# Altium PCB TMC6200_BOB.PcbDoc
Units mm, origin at the board's own origin, x right, y up, seen from the top; angles counter-clockwise.
Board outline 81 x 47 mm, 4 copper layers (Top Layer, Int1 (GND), Int2 (PWR), Bottom Layer), stack 1.334 mm thick; 76 components, 53 nets, 204 pads, 250 vias.
Unrouted connection lines stored in the file: 3.
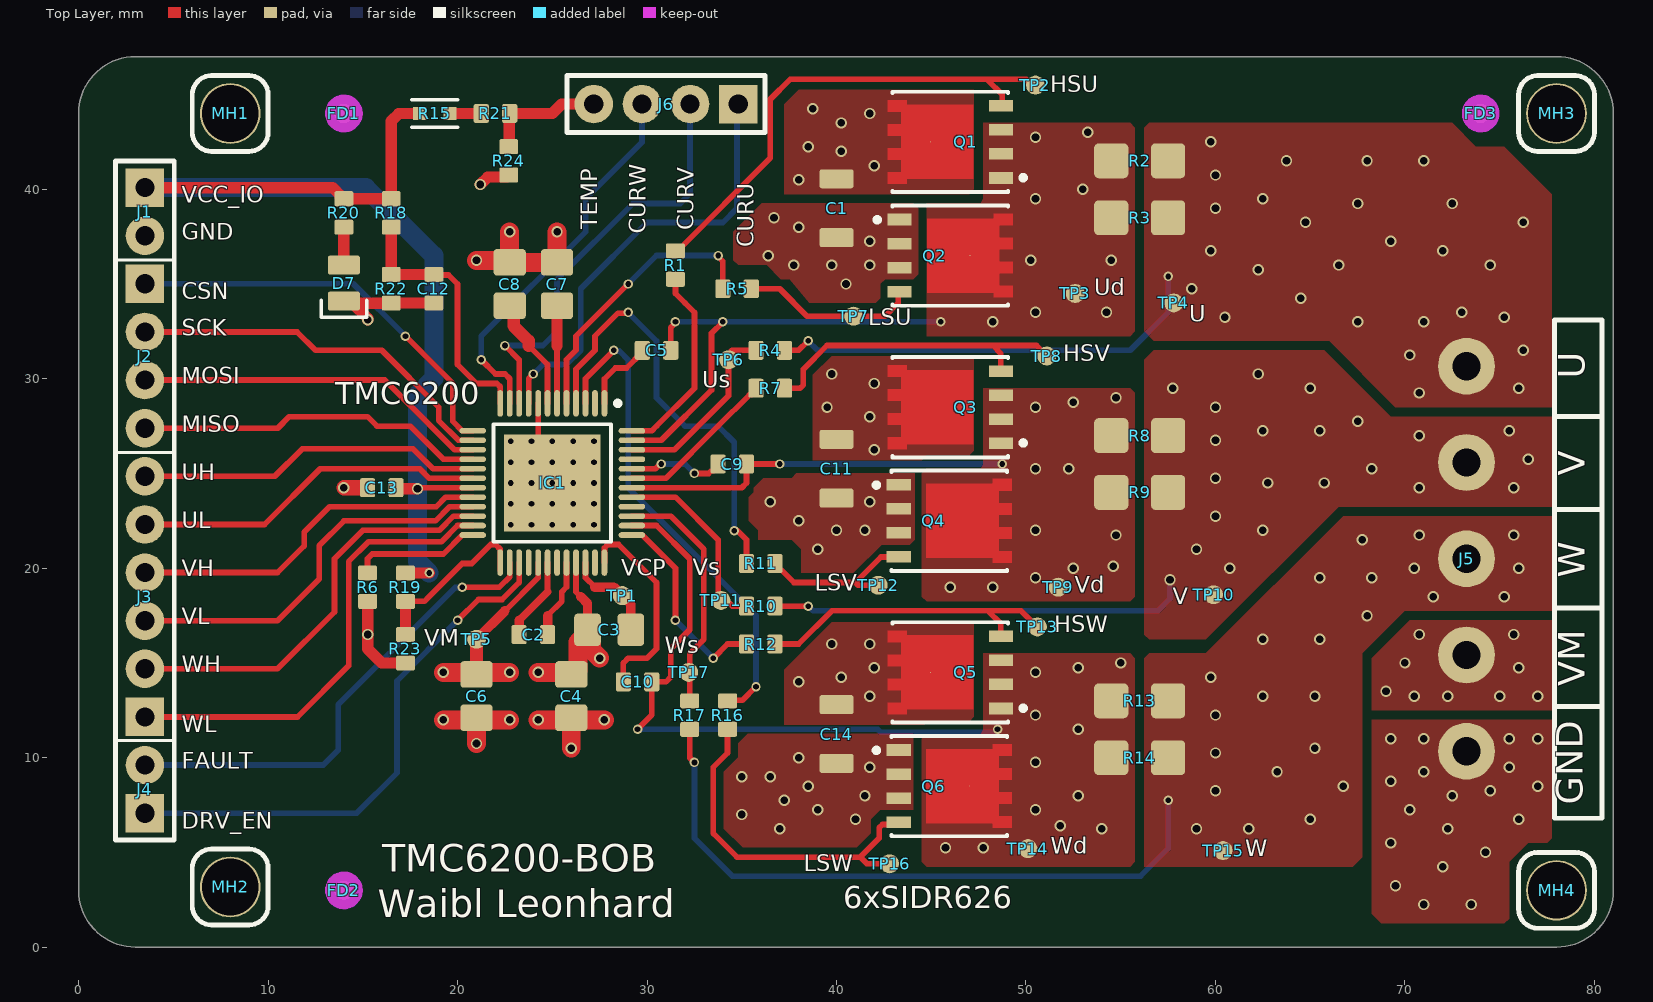
[diagram p0: Top Layer view]
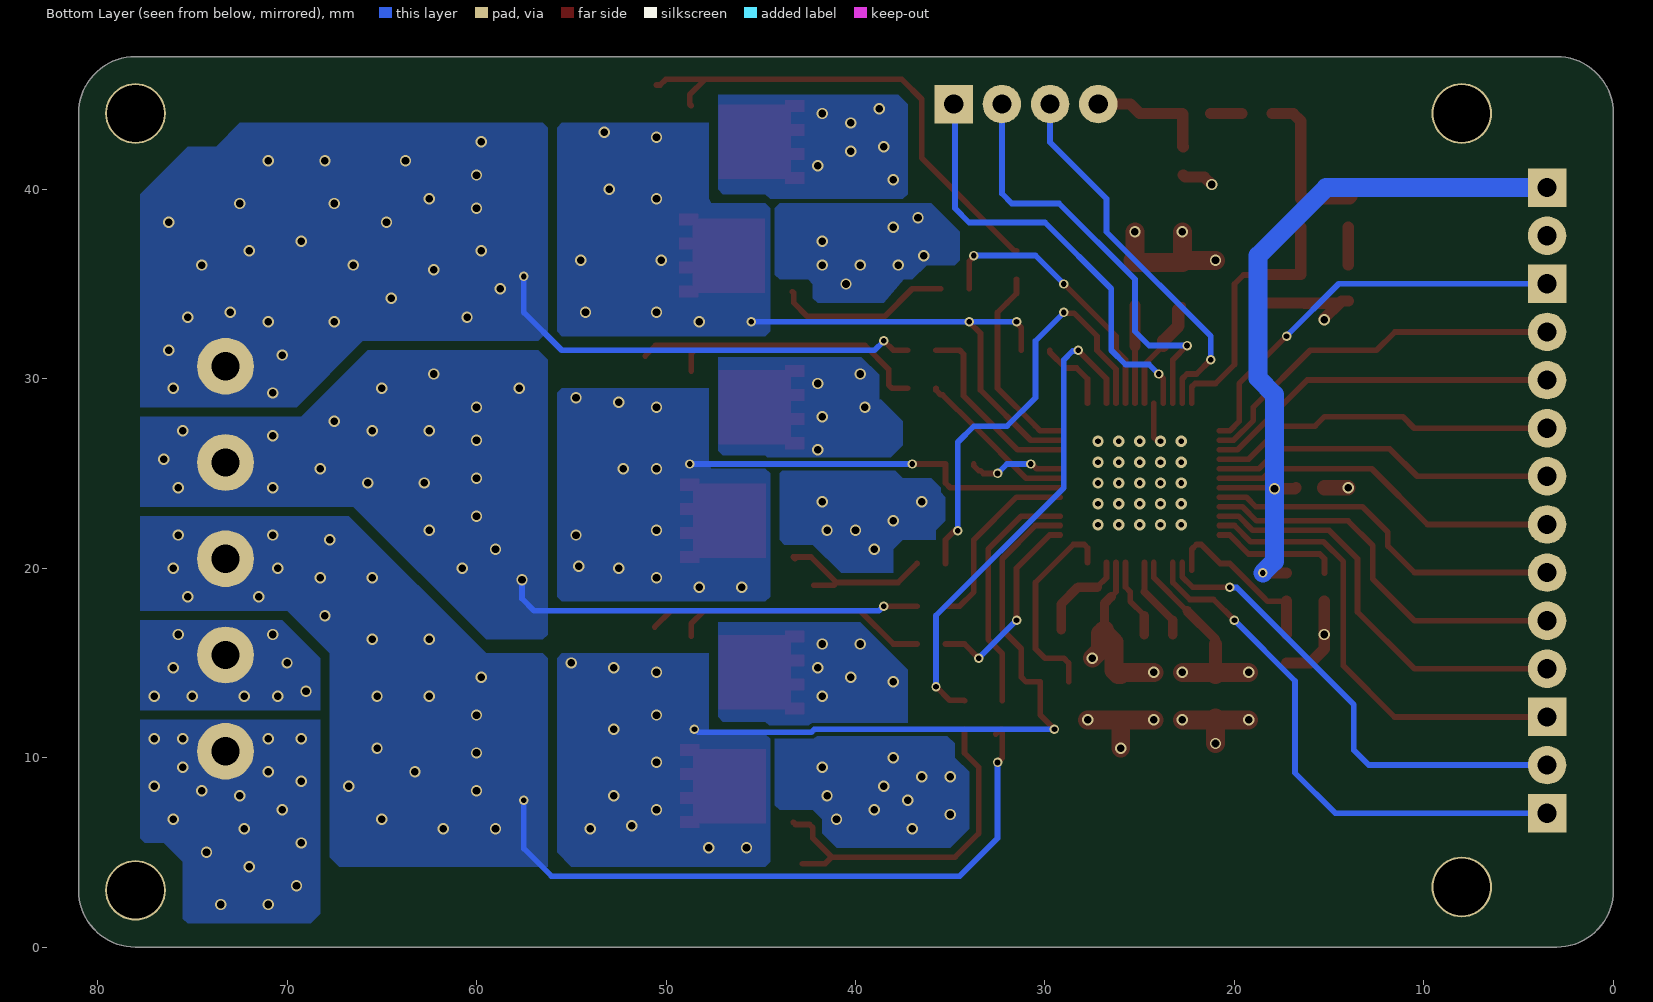
[diagram p1: Bottom Layer view, seen from below]
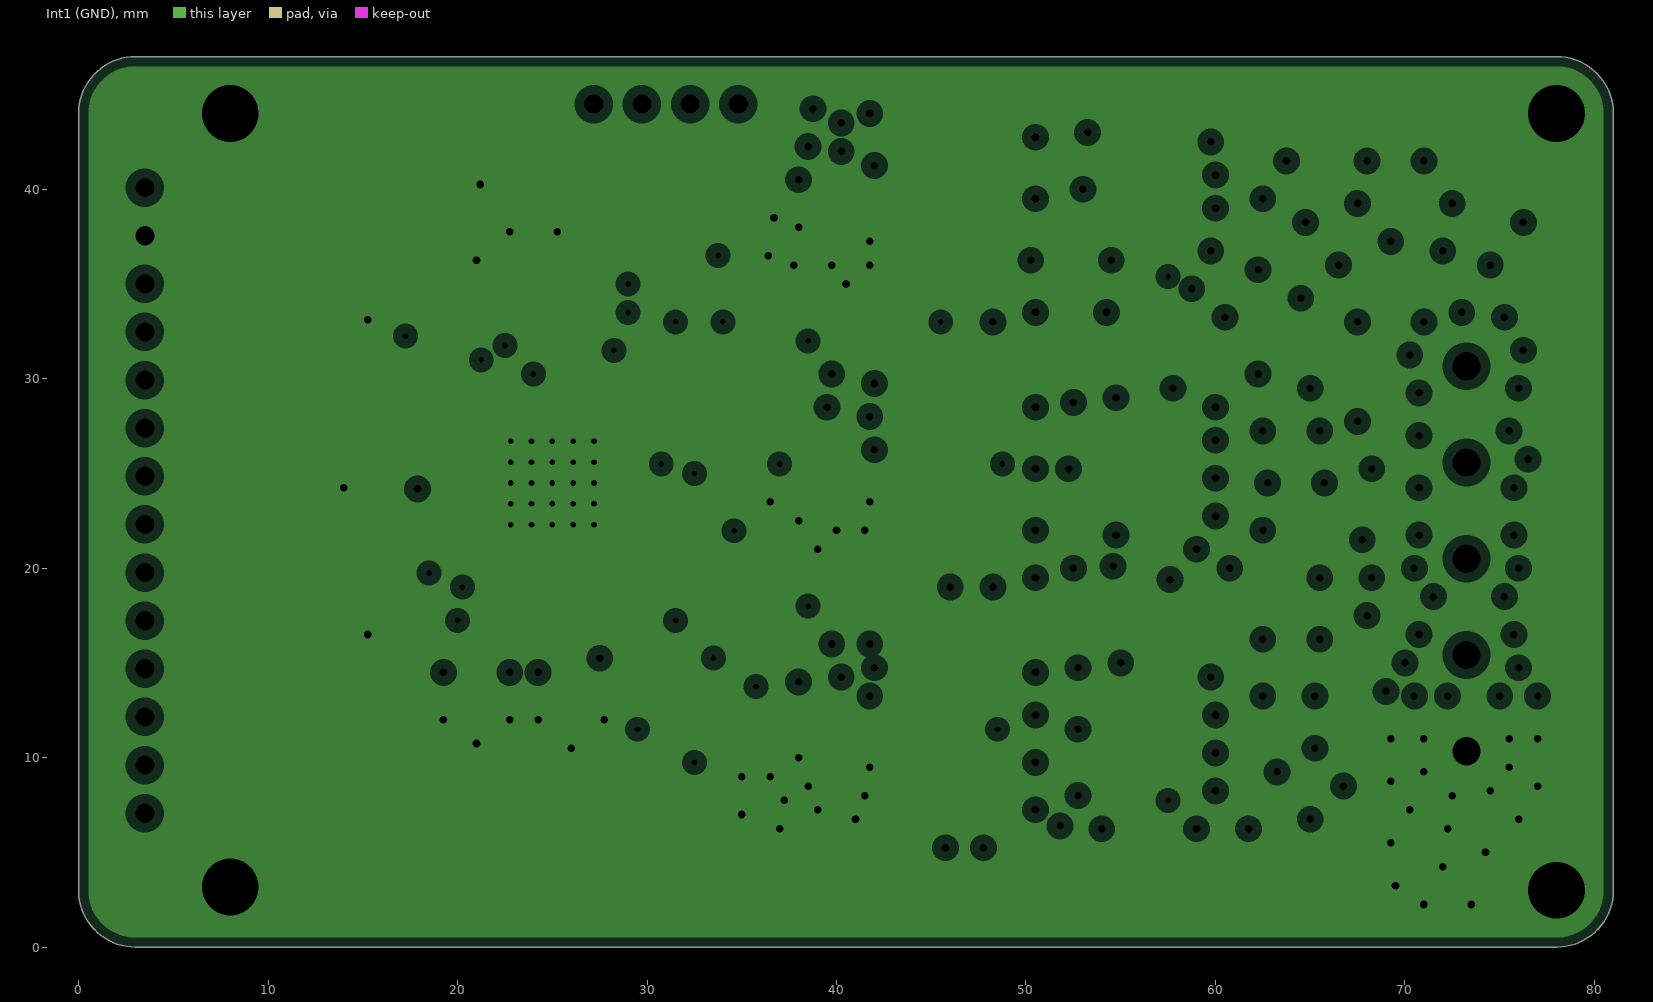
[diagram p2: Int1 (GND), clearances drawn from the general rule]
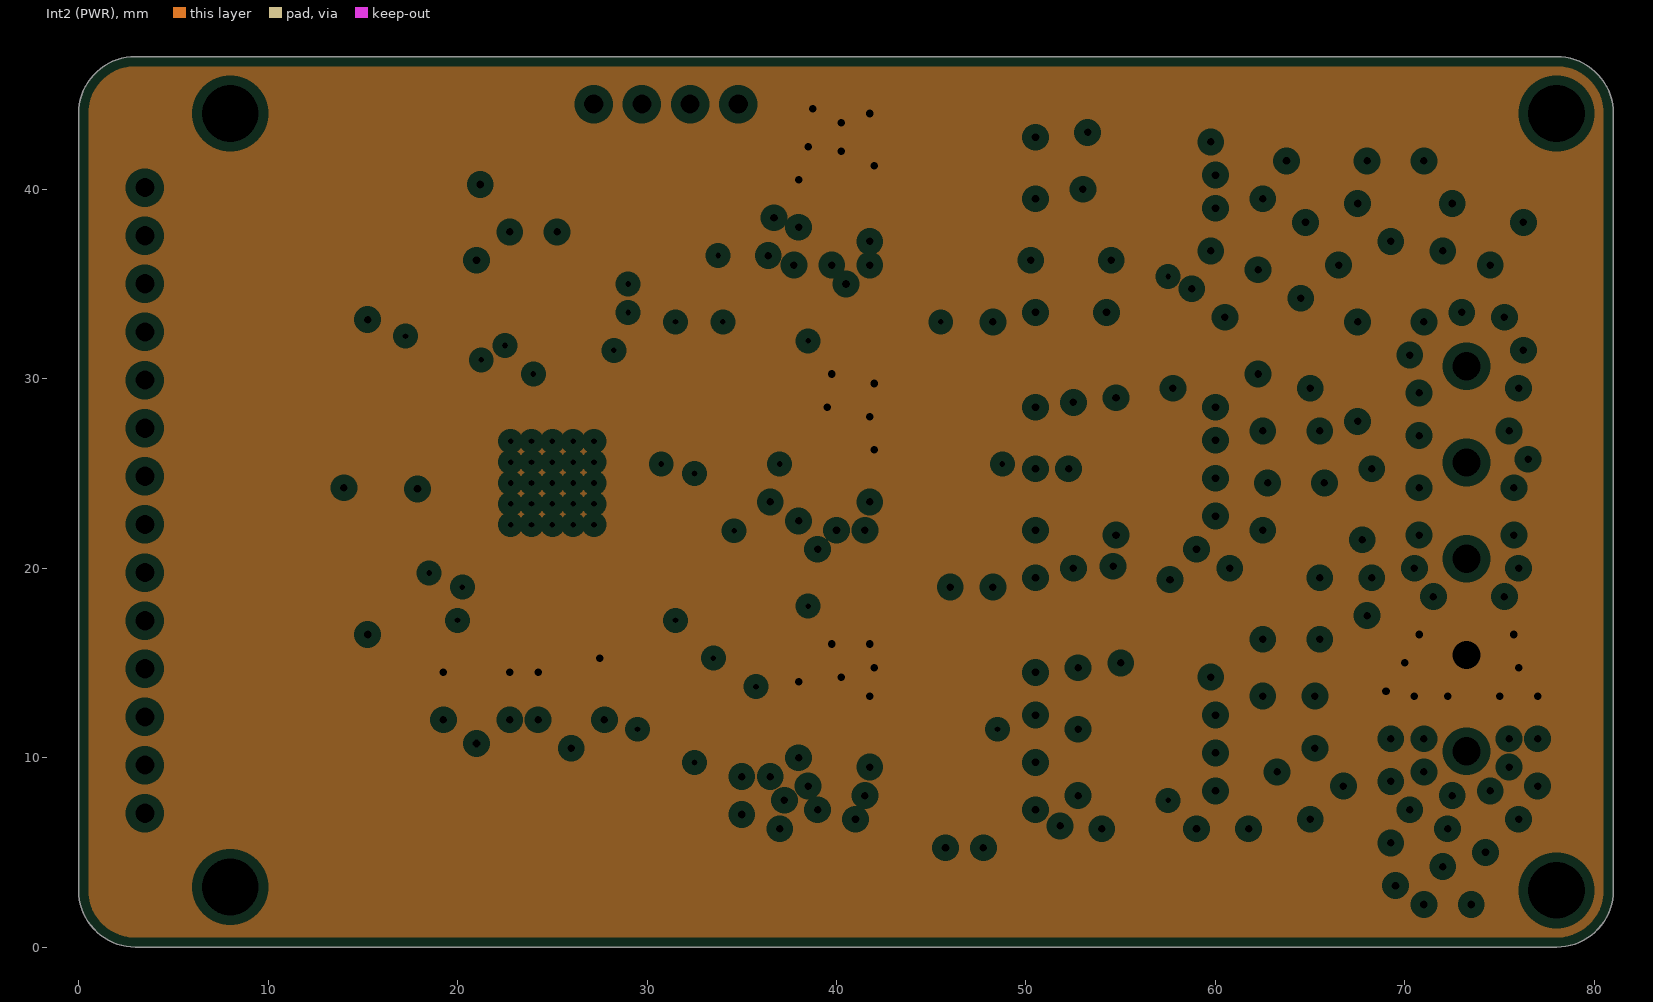
[diagram p3: Int2 (PWR), clearances drawn from the general rule]
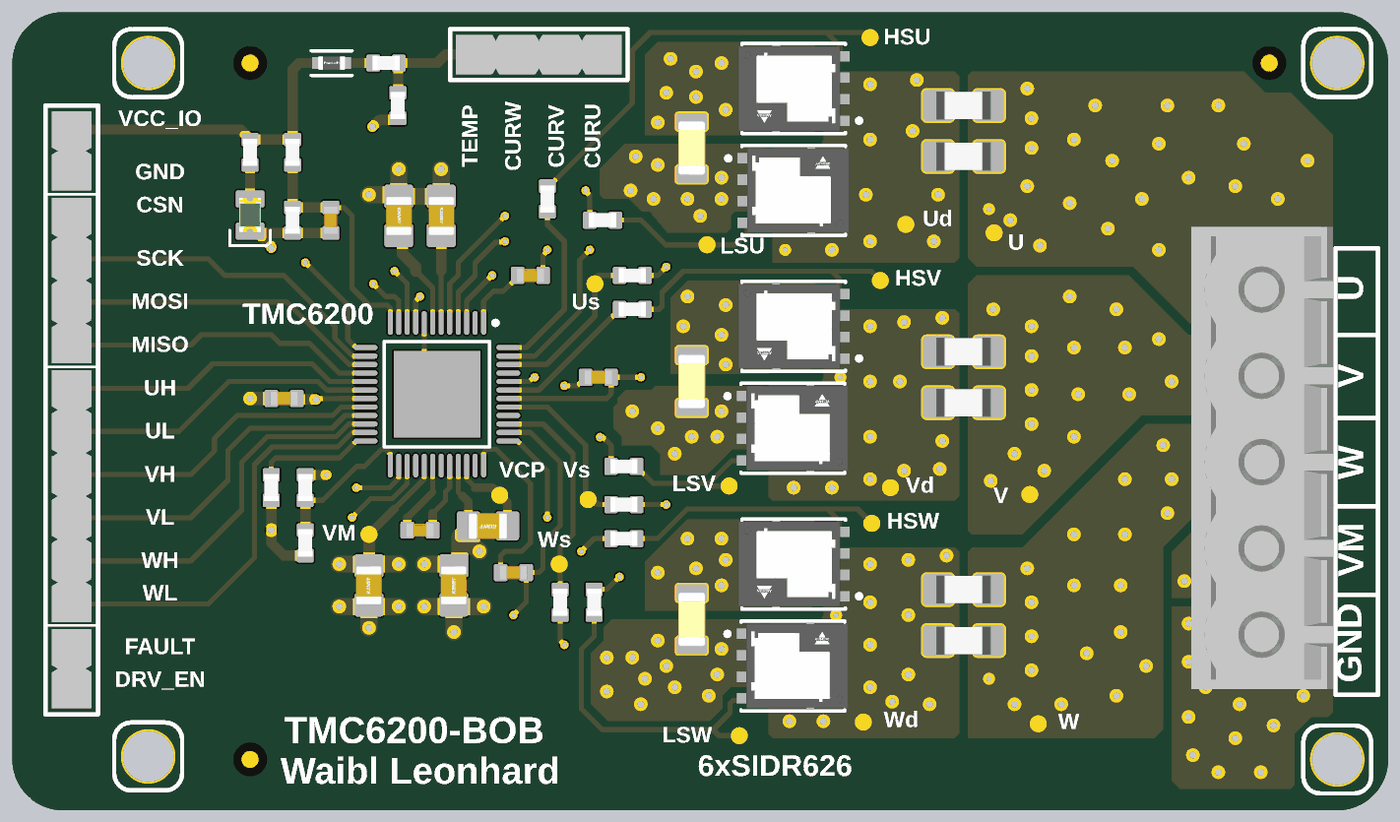
[diagram p4: 3D render of the assembled board from above, using the file's embedded part models]

## Layer stack, top to bottom
Top Solder: solder mask 0.0254, SM-002, Dk 4
Top Layer: signal copper 0.035
Dielectric 1: prepreg 0.1295, PP-017, Dk 4.3
Dielectric 2: prepreg 0.1295, PP-017, Dk 4.3
Int1 (GND): plane copper 0.0175, net GND
Dielectric 3: core 0.7112, Core-039, Dk 4.8
Int2 (PWR): plane copper 0.0175, net VM
Dielectric 4: prepreg 0.1295, PP-017, Dk 4.3
Dielectric 5: prepreg 0.1295, PP-017, Dk 4.3
Bottom Layer: signal copper 0.035
Bottom Solder: solder mask 0.0254, SM-002, Dk 4

## Board outline
3,0 cw(c3,3) 0,3 0,44 cw(c3,44) 3,47 78,47 cw(c78,44) 81,44 81,3 cw(c78,3) 78,0

## Design rules (kind name [scope] priority, off if disabled: settings)
Clearance Clearance_JLC [All] p1: gap=0.2 ignorepadtopadclearanceinfootprint=FALSE // Clearance for JLCPCB
Clearance [All] p2: gap=0.254 ignorepadtopadclearanceinfootprint=FALSE
HoleSize [All] p1: absolutevalues=TRUE maxlimit=6.3 minlimit=0.15 maxpercent=80.000 minpercent=20.000
HoleToHoleClearance [All] p1: gap=0.5 allowstackedmicrovias=TRUE
MinimumSolderMaskSliver [All] p1: minsoldermaskwidth=0.1
PlaneClearance [All] p1: clearance=0.508
PlaneConnect [All] p1: planeconnectstyle=Direct reliefexpansion=0.508 reliefentries=4 reliefconductorwidth=0.254 reliefairgap=0.254
PolygonConnect [All] p1: connectstyle=Direct reliefconductorwidth=0.254 reliefentries=4 polygonreliefangle="90 Angle" airgapwidth=0.254
RoutingVias [All] p1: holewidth=1 width=1.3 viastyle="Through Hole" minholewidth=0.3 minwidth=0.45 maxholewidth=1.85 maxwidth=10
SolderMaskExpansion [All] p1: expansion=0.102 istentingtop=FALSE
SupplyNets "Schematic Supply Nets_2" [InNet('GND')] p1: voltage=0.000
SupplyNets "Schematic Supply Nets_1" [InNet('VCC_IO')] p2: voltage=0.000
SupplyNets "Schematic Supply Nets" [InNet('VM')] p3: voltage=0.000
Width [All] p1: maxlimit=1 minlimit=0.09 preferedwidth=0.3
25 further rules are at their usual default settings.

## Components (designator, comment, footprint, x,y, rotation, side; value= is the part's Value field where it differs from the comment)
C1 "2u2/100V" CAP_1206 40,39 r90 top
C2 "22n/100V" CAP_0603 24,16.5 r0 top
C3 "100n/100V" CAP_0805#1 28,16.75 r180 top
C4 "100n/100V" CAP_0805#1 26,13.25 r90 top
C5 "470n/16V" CAP_0603 30.5,31.5 r0 top
C6 "100n/100V" CAP_0805#2 21,13.25 r90 top
C7 "2u2/50V" CAP_0805#1 25.25,35 r270 top
C8 "2u2/50V" CAP_0805#1 22.75,35 r270 top
C9 "470n/16V" CAP_0603 34.5,25.5 r0 top
C10 "470n/16V" CAP_0603 29.5,14 r0 top
C11 "2u2/100V" CAP_1206 40,25.25 r90 top
C12 "100n/50V" CAP_0603 18.75,34.75 r90 top
C13 "100n/50V" CAP_0603 16,24.25 r180 top
C14 "2u2/100V" CAP_1206 40,11.25 r90 top
D7 "LED_0805_GREEN" LED_0805_GREEN 14,35.05 r90 top
FD1 "FID1X2R" FID1X2R 14,44 r0 top
FD2 "FID1X2R" FID1X2R 14,3 r90 top
FD3 "FID1X2R" FID1X2R 74,44 r90 top
IC1 "TMC6200-TA-T" TSQFP50P900X900X120_HS-49N 25,24.5 r270 top
J1 "1x2 Header" "1x2 Header-Footprint-1" 3.5,38.82 r270 top
J2 "1x4 Header" "1x4 Header-Footprint-1" 3.5,31.2 r270 top
J3 "1x6 Header" "1x6 Header-Footprint-1" 3.5,18.5 r90 top
J4 "1x2 Header" "1x2 Header-Footprint-1" 3.5,8.34 r90 top
J5 "796636-5" 796636-5-Footprint-1 73.25,20.5 r270 top
J6 "1x4 Header" "1x4 Header-Footprint-1" 31,44.5 r180 top
MH1 "MTHP3P2MM" MTHP3P2MM-Footprint-1 8,44 r0 top
MH2 "MTHP3P2MM" MTHP3P2MM-Footprint-1 8,3.175 r0 top
MH3 "MTHP3P2MM" MTHP3P2MM-Footprint-1 78,44 r0 top
MH4 "MTHP3P2MM" MTHP3P2MM-Footprint-1 78,3 r0 top
Q1 "SIDR626LDP-T1-RE3" FP-T21-0014-SINGLE-MFG 46,42.5 r180 top
Q2 "SIDR626LDP-T1-RE3" FP-T21-0014-SINGLE-MFG 46,36.5 r0 top
Q3 "SIDR626LDP-T1-RE3" FP-T21-0014-SINGLE-MFG 46,28.5 r180 top
Q4 "SIDR626LDP-T1-RE3" FP-T21-0014-SINGLE-MFG 45.955,22.5 r0 top
Q5 "SIDR626LDP-T1-RE3" FP-T21-0014-SINGLE-MFG 46,14.5 r180 top
Q6 "SIDR626LDP-T1-RE3" FP-T21-0014-SINGLE-MFG 45.955,8.5 r0 top
R1 "2R2/1%" RES_0603 31.5,36 r90 top
R2 "0R033/1%/1W" RES_1206 56,41.5 r0 top
R3 "0R033/1%/1W" RES_1206 56,38.5 r0 top
R4 "10R/1%" RES_0603 36.5,31.5 r0 top
R5 "2R2/1%" RES_0603 34.75,34.75 r0 top
R6 "0R" RES_0603 15.25,19 r90 top
R7 "2R2/1%" RES_0603 36.5,29.5 r0 top
R8 "0R033/1%/1W" RES_1206 56,27 r0 top
R9 "0R033/1%/1W" RES_1206 56,24 r0 top
R10 "10R/1%" RES_0603 36,18 r0 top
R11 "2R2/1%" RES_0603 36,20.25 r0 top
R12 "2R2/1%" RES_0603 36,16 r0 top
R13 "0R033/1%/1W" RES_1206 56,13 r0 top
R14 "0R033/1%/1W" RES_1206 56,10 r0 top
R15 "ERT-J1VG103FA" FP-ERTJ1-MFG 18.8,44 r0 top
R16 "2R2/1%" RES_0603 34.25,12.25 r270 top
R17 "10R/1%" RES_0603 32.25,12.25 r270 top
R18 "1k5/1%" RES_0603 16.5,38.75 r90 top
R19 "0R" RES_0603 17.25,19 r90 top
R20 "1k" RES_0603 14,38.75 r90 top
R21 "1k5/1%" RES_0603 22,44 r180 top
R22 "4k7/1%" RES_0603 16.5,34.75 r90 top
R23 "0R" RES_0603 17.25,15.75 r90 top
R24 "1k5/1%" RES_0603 22.7,41.5 r90 top
TP1 "TEST_POINT_RND_1MM" PAD_RND_1MM 28.697,18.554 r90 top
TP2 "TEST_POINT_RND_1MM" PAD_RND_1MM 50.5,45.5 r90 top
TP3 "TEST_POINT_RND_1MM" PAD_RND_1MM 52.6,34.5 r90 top
TP4 "TEST_POINT_RND_1MM" PAD_RND_1MM 57.8,34 r90 top
TP5 "TEST_POINT_RND_1MM" PAD_RND_1MM 21,16.25 r90 top
TP6 "TEST_POINT_RND_1MM" PAD_RND_1MM 34.3,31 r90 top
TP7 "TEST_POINT_RND_1MM" PAD_RND_1MM 40.9,33.3 r90 top
TP8 "TEST_POINT_RND_1MM" PAD_RND_1MM 51.1,31.2 r90 top
TP9 "TEST_POINT_RND_1MM" PAD_RND_1MM 51.7,19 r90 top
TP10 "TEST_POINT_RND_1MM" PAD_RND_1MM 59.9,18.6 r90 top
TP11 "TEST_POINT_RND_1MM" PAD_RND_1MM 33.9,18.3 r90 top
TP12 "TEST_POINT_RND_1MM" PAD_RND_1MM 42.2,19.1 r90 top
TP13 "TEST_POINT_RND_1MM" PAD_RND_1MM 50.6,16.9 r90 top
TP14 "TEST_POINT_RND_1MM" PAD_RND_1MM 50.1,5.2 r90 top
TP15 "TEST_POINT_RND_1MM" PAD_RND_1MM 60.4,5.1 r90 top
TP16 "TEST_POINT_RND_1MM" PAD_RND_1MM 42.8,4.4 r90 top
TP17 "TEST_POINT_RND_1MM" PAD_RND_1MM 32.2,14.5 r90 top

## Footprints (in the part's own frame and the unit in brackets; to place one, negate y for a bottom-side part, rotate by r counter-clockwise, add the part's x,y. Pads: shape width x height; smd on the part's side, far side on the other; paste and mask are expansions set on the pad)
"1x2 Header-Footprint-1" [mil]
  rect 80x80 hole 40 paste-99999 mask+0: 1(-50,0)
  round 80 hole 40 paste-99999 mask+0: 2(50,0)
  body extent -92,-46 92,46, height 320
"1x4 Header-Footprint-1" [mil]
  rect 80x80 hole 40 paste-99999 mask+0: 1(-150,0)
  round 80 hole 40 paste-99999 mask+0: 2(-50,0) 3(50,0) 4(150,0)
  body extent -192,-46 192,46, height 320
"1x6 Header-Footprint-1" [mil]
  rect 80x80 hole 40 paste-99999 mask+0: 1(-250,0)
  round 80 hole 40 paste-99999 mask+0: 2(-150,0) 3(-50,0) 4(50,0) 5(150,0) 6(250,0)
  body extent -292,-46 292,46, height 320
796636-5-Footprint-1 [mm]
  round 3 hole 1.5 paste-2539.97 mask+0: 1(-10.16,0) 2(-5.08,0) 3(0,0) 4(5.08,0) 5(10.16,0)
  body extent -13.86,-3.85 13.36,4.5, height 12
CAP_0603 [mm]
  rrect25% 0.8x1 smd: 1(-0.75,0) 2(0.75,0)
  body extent -0.8,-0.4 0.8,0.4, height 0.51
CAP_0805#1 [mm]
  rrect25% 1.4x1.7 smd: 1(-1.143,0) 2(1.143,0)
  body extent -1.15,-0.76 1.15,0.79, height 1.01
CAP_0805#2 [mm]
  rrect25% 1.4x1.7 smd: 1(-1.143,0)
  rrect25% 1.4x1.7 smd mask+0.102: 2(1.143,0)
  body extent -1.15,-0.76 1.15,0.79, height 1.01
CAP_1206 [mm]
  rrect25% 1x1.8 smd: 1(-1.55,0) 2(1.55,0)
  body extent -1.6,-0.8 1.6,0.8, height 0.94
FID1X2R [mm] "Fiducial - Round 1x2mm"
  round 1 smd paste-0.5 mask+0.5: 0(0,0)
  Top Layer keep-out circle w1: c0,0 r0.5
FP-ERTJ1-MFG [mm]
  rect 0.7x0.7 smd paste+0 mask+0: 1(-0.8,0) 2(0.8,0)
  silkscreen extent -1.2,-0.72 1.2,0.72, body extent -1.25,-0.55 1.25,0.55, height 0.25
FP-T21-0014-SINGLE-MFG [mm]
  rect 1.27x0.61 smd paste+0 mask+0: 1(-2.67,1.905) 2(-2.67,0.635) 3(-2.67,-0.635) 4(-2.67,-1.905)
  round 0.025 smd paste+0 mask+0: 5-6-7-8(1.045,0)
  Top Layer region: 3.305,2.21 3.305,1.6 2.595,1.6 2.595,0.94 3.305,0.94 3.305,0.33 2.595,0.33 2.595,-0.33 3.305,-0.33 3.305,-0.94 2.595,-0.94 2.595,-1.6 3.305,-1.6 3.305,-2.21 2.285,-2.21 2.285,-1.955 -1.215,-1.955 -1.215,1.955 2.285,1.955 2.285,2.21 3.305,2.21
  silkscreen extent -3.98,-2.65 3.05,2.65, body extent -3.4,-2.65 3.41,2.65, height 0.25
LED_0805_GREEN [mm]
  rrect25% 1x1.7 smd: A(0.95,0) K(-0.95,0)
  silkscreen extent -1.8,-1.2 -0.9,1.2, body extent -1,-0.63 1,0.63, height 1.12
MTHP3P2MM-Footprint-1 [mm]
  round 3.2 hole 3 paste-2539.97 mask+0: 1(0,0)
  silkscreen extent -2,-2 2,2
PAD_RND_1MM [mm]
  round 1 smd paste-0.5 mask+0: 1(0,0)
RES_0603 [mm]
  rrect25% 0.8x1 smd: 1(-0.75,0) 2(0.75,0)
  body extent -0.8,-0.43 0.8,0.43, height 0.52
RES_1206 [mm]
  rrect25% 1.8x1.84 smd: 1(-1.5,0) 2(1.5,0)
  body extent -1.6,-0.83 1.6,0.83, height 0.57
TSQFP50P900X900X120_HS-49N [mm] "TSQFP, 48-Leads, Body 7,00x7,00mm, Pitch 0,50mm, Thermal Pad 5,10x5,10mm, IPC Medium Density"
  oval 1.4x0.3 smd: 1(-4.2,2.75) 2(-4.2,2.25) 3(-4.2,1.75) 4(-4.2,1.25) 5(-4.2,0.75) 6(-4.2,0.25) 7(-4.2,-0.25) 8(-4.2,-0.75) 9(-4.2,-1.25) 10(-4.2,-1.75) 11(-4.2,-2.25) 12(-4.2,-2.75) 25(4.2,-2.75) 26(4.2,-2.25) 27(4.2,-1.75) 28(4.2,-1.25) 29(4.2,-0.75) 30(4.2,-0.25) 31(4.2,0.25) 32(4.2,0.75) 33(4.2,1.25) 34(4.2,1.75) 35(4.2,2.25) 36(4.2,2.75)
  oval 0.3x1.4 smd: 13(-2.75,-4.2) 14(-2.25,-4.2) 15(-1.75,-4.2) 16(-1.25,-4.2) 17(-0.75,-4.2) 18(-0.25,-4.2) 19(0.25,-4.2) 20(0.75,-4.2) 21(1.25,-4.2) 22(1.75,-4.2) 23(2.25,-4.2) 24(2.75,-4.2) 37(2.75,4.2) 38(2.25,4.2) 39(1.75,4.2) 40(1.25,4.2) 41(0.75,4.2) 42(0.25,4.2) 43(-0.25,4.2) 44(-0.75,4.2) 45(-1.25,4.2) 46(-1.75,4.2) 47(-2.25,4.2) 48(-2.75,4.2)
  rect 5.1x5.1 smd: 49(0,0)
  silkscreen extent -4.32,-3.1 3.1,3.57, body extent -3.44,-3.5 3.56,3.5, height 1.2

## Part data
C1 C11 C14: library part CMP-001-00089-1, "Capacitor SMD 1206", Design Item ID=CAP_1206, Source=Schematic-Lib-PhilsLab.SchLib
C2 C5 C9 C10 C12 C13: library part CMP-001-00087-1, "Capacitor SMD 0603", Design Item ID=CAP_0603, Source=Schematic-Lib-PhilsLab.SchLib
C3 C4 C6 C7 C8: library part CMP-001-00088-1, "Capacitor SMD 0805", Design Item ID=CAP_0805, Source=Schematic-Lib-PhilsLab.SchLib
D7: library part CMP-004-00052-1, "LED 0805 GREEN SMD", Design Item ID=LED_0805_GREEN, Source=Schematic-Lib-PhilsLab.SchLib
FD1 FD2 FD3: library part CMP-00028-00005-2, "Fiducial - Round 1x2mm", Pins=0
IC1: library part CMP-00024-00013-6, "Surface Mount Tape & Reel (TR) Active Gate Drivers ICs CMOS 6 85V V 48-TQFP Exposed Pad Half-Bridge"
J1 J4: library part CMP-002-00330-3, "TE 5-146280-2, PCB Mount Header, Vertical, Board-to-Board, 2 Position, 2.54 mm [.1 in] Centerline, Breakaway, Gold, Through Hole - Solder, Signal, AMPMODU Headers"
J2 J6: library part CMP-002-00328-4, "TE 5-146280-3, PCB Mount Header, Vertical, Board-to-Board, 3 Position, 2.54 mm [.1 in] Centerline, Breakaway, Gold, Through Hole - Solder, Signal, AMPMODU Headers"
J3: library part CMP-002-00329-3, "TE 5-146280-6, PCB Mount Header, Vertical, Board-to-Board, 6 Position, 2.54 mm [.1 in] Centerline, Breakaway, Gold, Through Hole - Solder, Signal, Black, Carton"
J5: library part CMP-002-00327-2, "PCB Terminal Blocks, Header, Wire-to-Board, 5 Position, .2 in [5.08 mm] Centerline, 1 Row, 30 – 12 AWG Wire Size, .05 – 3 mm² Wire Size", Max Current Rating=15A, Voltage Rating=300V, Mounting Technology=Board, RoHS Compliant=Yes
MH1 MH2 MH3 MH4: library part CMP-00028-00009-2, "Mounting Hole Plated 3.2 mm drill"
Q1 Q2 Q3 Q4 Q5 Q6: library part CMP-013-00035-3, "Mosfet, N-Ch, 60V, 204A, Powerpak So Rohs Compliant: Yes", Case/Package=Powerpak, Mounting Technology=SMT, Pins=8, Transistor Type=mosfet
R1 R4 R5 R6 R7 R10 R11 R12 R16 R17 R18 R19 R20 R21 R22 R23 R24: library part CMP-009-00179-2, "Resistor SMD 0603", Design Item ID=RES_0603, Source=Schematic-Lib-PhilsLab.SchLib
R2 R3 R8 R9 R13 R14: library part CMP-009-00181-2, "Resistor SMD 1206", Design Item ID=RES_1206, Source=Schematic-Lib-PhilsLab.SchLib
R15: library part CMP-05419-000001-1, "THERMISTOR NTC 10KOHM 3380K 0603", Case Code (Imperial)=0603, Case Code (Metric)=1608, Max Operating Temperature=125°C, Max Power Dissipation=100mW, Min Operating Temperature=-40°C, Package Quantity=4000, Resistance=10kR, Resistance Tolerance=1%, Accuracy=1%, Case/Package=0603, Depth=0.8mm, Height=0.8mm, Lead Free="Lead Free", Length=1.6mm, Mount="Surface Mount", Number of Pins=2, Packaging="Tape and Reel", Power Rating=100mW, Radiation Hardening=No, REACH SVHC="No SVHC", RoHS Compliant=Yes, Series=ERT-J, Termination=SMD/SMT, Tolerance=1%, Width=800um
TP1 TP2 TP3 TP4 TP5 TP6 TP7 TP8 TP9 TP10 TP11 TP12 TP13 TP14 TP15 TP16 TP17: library part CMP-023-000001-1, "Test Point Round 1mm (NO BOM)", Design Item ID=TEST_POINT_RND_1MM, Source=Schematic-Lib-PhilsLab.SchLib

## Via types
v1: diameter 0.6, hole 0.4, Top Layer to Bottom Layer, 196 vias
v2: diameter 0.5, hole 0.3, Top Layer to Bottom Layer, 29 vias
v3: diameter 0.6, hole 0.3, Top Layer to Bottom Layer, 25 vias

## Nets (pads, with @x,y where several pads share a name; then routed paths per layer and width w, separated by ;. In a path a pad name is that pad's centre, name@x,y a point inside that pad or via, vN(x,y) a via of type N, cw(c..) or ccw(c..) an arc to the next point about the centre after c; other vN are vias at no path point)
CSN: IC1.13 J2.1 | length 21.7
  Top Layer w0.3: v2(17.25,32.25) 19.75,29.75 19.75,27.75 20.25,27.25 IC1.13
  Bottom Layer w0.3: J2.1 14.49,35.01 v2(17.25,32.25)
CURU: IC1.9 J6.1 | length 23.5
  Top Layer w0.3: IC1.9 23.75,30 v2(24,30.25)
  Bottom Layer w0.3: v2(24,30.25) 24.5,30.75 25.75,30.75 26.5,31.5 26.5,34.75 30,38.25 34,38.25 34.75,39 34.75,44.44 J6.1
CURV: IC1.10 J6.2 | length 22.8
  Top Layer w0.3: v2(22.5,31.75) 23.25,31 IC1.10
  Bottom Layer w0.3: v2(22.5,31.75) 24.5,31.75 25.25,32.5 25.25,35.25 29.25,39.25 31.75,39.25 32.27,39.77 J6.2
CURW: IC1.11 J6.3 | length 20.2
  Top Layer w0.3: v2(21.25,31) 22,30.25 22.5,30.25 22.75,30 IC1.11
  Bottom Layer w0.3: v2(21.25,31) 21.25,32.25 26.75,37.75 26.75,39.5 29.73,42.48 J6.3
DRV_EN: IC1.27 J4.1 | length 28.7
  Top Layer w0.3: v2(20,17.25) 21.1,18.35 22.35,18.35 23.25,19.25 IC1.27
  Bottom Layer w0.3: J4.1 14.67,7.07 16.8,9.2 16.8,14.05 v2(20,17.25)
FAULT: IC1.26 J4.2 | length 25.5
  Top Layer w0.3: v2(20.25,19) 22.207,19 22.75,19.543 IC1.26
  Bottom Layer w0.3: J4.2 12.91,9.61 13.7,10.4 13.7,12.8 19.88,18.98 20.23,18.98 v2(20.25,19)
GND: C1.1 C4.1 C6.1 C7.1 C8.1 C11.1 C12.1 C13.2 C14.1 D7.K IC1.8 IC1.49 J1.2 J5.5 MH1.1 MH2.1 MH3.1 MH4.1 Q2.1 Q2.2 Q2.3 Q4.1 Q4.2 Q4.3 Q6.1 Q6.2 Q6.3 R6.1 R22.1 R23.1 R24.1 | length 33.6
  Top Layer w0.3: v3(23.9,26.7) 24.05,26.7 24.25,26.9 IC1.8
  Top Layer w0.6: D7.K 14.35,34.1 D7.K@14.466,33.984 ; R6.1 v1(15.25,16.5) 15.25,15.75 16,15 R23.1 ; v1(15.25,33.12) 15.25,33.2 D7.K@14.466,33.984 ; C12.1 R22.1 16.316,34 16.3,33.984 D7.K@14.466,33.984 ; v1(21.2,40.25) 21.6,40.65 22.6,40.65 R24.1
  Top Layer w0.8: v1(14,24.25) C13.2
  Top Layer w1: v1(19.25,12) 20.893,12 C6.1 ; v1(21,10.75) C6.1 ; v1(21,36.25) 22.643,36.25 C8.1 ; v1(22.75,12) 21.107,12 C6.1 ; v1(22.75,37.75) C8.1 ; v1(24.25,12) C4.1@26,12 ; v1(25.25,37.75) C7.1 ; C7.1@25.357,36.25 C7.1 ; v1(26,10.5) C4.1@26,12 ; v1(27.75,12) C4.1@26,12 ; C8.1 C7.1
  other v1: 71,2.25 73.5,2.25 69.5,3.25 72,4.25 74.25,5 69.25,5.5 37,6.25 72.25,6.25 41,6.75 76,6.75 35,7 39,7.25 70.25,7.25 37.25,7.75 41.5,8 72.5,8 74.5,8.25 38.5,8.5 77,8.5 69.25,8.75 35,9 36.5,9 71,9.25 41.75,9.5 75.5,9.5 38,10 69.25,11 71,11 75.5,11 77,11 39,21 40,22 41.5,22 38,22.5 36.5,23.5 41.75,23.5 40.5,35 37.75,36 39.75,36 41.75,36 36.4,36.5 41.75,37.25 38,38 36.7,38.5
  other v3: 22.8,22.3 23.9,22.3 25,22.3 26.1,22.3 27.2,22.3 22.8,23.4 23.9,23.4 25,23.4 26.1,23.4 27.2,23.4 22.8,24.5 23.9,24.5 25,24.5 26.1,24.5 27.2,24.5 22.8,25.6 23.9,25.6 25,25.6 26.1,25.6 27.2,25.6 22.8,26.7 25,26.7 26.1,26.7 27.2,26.7
HSU: IC1.48 R1.1 | length 10.4
  Top Layer w0.3: IC1.48 30.25,27.25 30.5,27.5 32.5,29.5 32.5,33.5 32,34 31.5,34.5 R1.1
HSV: IC1.43 R7.1 | length 8.6
  Top Layer w0.3: IC1.43 31,24.75 33.75,27.5 35.4,29.15 35.5,29.15 35.75,29.4 R7.1
HSW: IC1.37 R12.1 | length 10.7
  Top Layer w0.3: IC1.37 29.75,21.75 31.5,20 v2(31.5,17.25) ; v2(33.5,15.25) 34.25,16 R12.1
  Bottom Layer w0.3: v2(31.5,17.25) v2(33.5,15.25)
LSU: IC1.5 R5.1 | length 14.9
  Top Layer w0.3: IC1.5 25.75,31 26.25,31.5 26.25,32.25 v2(29,35) ; v2(33.75,36.5) 33.75,36.446 34,36.196 R5.1
  Bottom Layer w0.3: v2(29,35) 30.5,36.5 v2(33.75,36.5)
LSV: IC1.4 R11.1 | length 23.2
  Top Layer w0.3: IC1.4 26.25,30.5 27.25,31.5 27.25,32.25 28.462,33.462 28.962,33.462 v2(29,33.5) ; v2(34.6,21.976) 34.726,21.976 34.75,22 35.25,21.5 R11.1
  Bottom Layer w0.3: v2(29,33.5) 30.5,32 30.5,29 32,27.5 33.75,27.5 34.6,26.65 v2(34.6,21.976)
LSW: IC1.3 R16.1 | length 26.2
  Top Layer w0.3: IC1.3 26.75,30 v2(28.25,31.5) ; R16.1 34.274,13.024 35.024,13.024 v2(35.75,13.75)
  Bottom Layer w0.3: v2(28.25,31.5) 28.288,31.462 28.538,31.462 29,31 29,24.25 35.75,17.5 v2(35.75,13.75)
MISO: IC1.16 J2.4 | length 18.5
  Top Layer w0.3: J2.4 10.505,27.39 11.115,28 15.25,28 15.75,27.5 17.5,27.5 19.25,25.75 IC1.16
MOSI: IC1.15 J2.3 | length 18.8
  Top Layer w0.3: J2.3 16.156,29.93 19.836,26.25 19.866,26.25 IC1.15
NetC2_1: C2.1 IC1.30 | length 4.4
  Top Layer w0.3: 24.75,18.75 IC1.30
  Top Layer w0.4: 23.25,17.25 24.75,18.75
  Top Layer w0.5: C2.1 23.25,17.25
NetC2_2: C2.2 IC1.32 | length 4.2
  Top Layer w0.3: 24.75,17.5 25.5,18.25 25.5,18.75 25.75,19 IC1.32
  Top Layer w0.5: C2.2 24.75,17.5
NetC3_1: C3.1 IC1.34 TP1.1 | length 5.1
  Top Layer w0.3: IC1.34 26.75,19.5 27.25,19
  Top Layer w0.5: 27.25,19 28.25,19 29.143,18.107 C3.1
NetC5_1: C5.1 IC1.1 | length 4
  Top Layer w0.3: IC1.1 27.75,29.993 28.328,30.572 28.922,30.572 29.75,31.4 C5.1
NetC7_2: C7.2 IC1.6 | length 5.2
  Top Layer w0.3: IC1.6 25.25,31.75
  Top Layer w0.6: 25.25,31.75 C7.2
NetC8_2: C8.2 IC1.7 | length 6
  Top Layer w0.3: 23.75,31.75 24.75,30.75 IC1.7
  Top Layer w0.4: C8.2 C8.2@22.959,33.648
  Top Layer w0.67: C8.2@22.959,33.648 22.959,32.791 23.75,32 23.75,31.75
NetC9_1: C9.1 IC1.44 | length 5.1
  Top Layer w0.3: IC1.44 30.446,25.25 30.696,25.5 v2(30.75,25.5) ; v2(32.5,25) 33.25,25 33.4,25.15 33.5,25.15 33.75,25.4 C9.1
  Bottom Layer w0.3: v2(30.75,25.5) 32,25.5 v2(32.5,25)
NetC10_1: C10.1 IC1.36 | length 11
  Top Layer w0.3: IC1.36 27.75,21.074 27.926,21.25 28.5,21.25 30.5,19.25 30.5,15.75 30,15.25 29,15.25 28.75,15 C10.1
NetD7_A: D7.A R20.1 | length 2
  Top Layer w0.6: D7.A R20.1
NetIC1_24: IC1.24 R6.2 | length 6.7
  Top Layer w0.3: R6.2 15.25,20.5 15.5,20.75 ; 15.589,20.75 19.25,20.75 20.25,21.75 IC1.24
NetQ1_4: Q1.4 R1.2 TP2.1 | length 26.4
  Top Layer w0.3: R1.2 31.6,36.75 36.5,41.65 36.5,44.75 37.55,45.8 47.95,45.8 ; Q1.4 48.75,44.485 48.75,45 47.95,45.8 ; TP2.1 50.311,45.5 50.011,45.8 47.95,45.8
NetQ2_4: Q2.4 R5.2 TP7.1 | length 9.3
  Top Layer w0.3: R5.2 37,34.75 38.45,33.3 42.55,33.3 43.266,34.016 43.266,34.531 Q2.4
NetQ3_4: Q3.4 R7.2 TP8.1 | length 17
  Top Layer w0.3: R7.2 38.074,29.5 38.25,29.676 38.25,30.5 39.5,31.75 48.25,31.75 ; Q3.4 48.67,31.33 48.25,31.75 ; TP8.1 50.55,31.75 48.25,31.75
NetQ4_4: Q4.4 R11.2 TP12.1 | length 8.9
  Top Layer w0.3: R11.2 37.75,19.25 41,19.25 ; TP12.1 41.15,19.1 41,19.25 ; Q4.4@43.19,20.5 Q4.4 42.345,20.595 41,19.25
NetQ5_4: Q5.4 R12.2 TP13.1 | length 16.5
  Top Layer w0.3: R12.2 38,16 39.75,17.75 48,17.75 ; Q5.4 48.67,17.08 48,17.75 ; TP13.1 49.75,17.75 48,17.75
NetQ6_4: Q6.4 R16.2 TP16.1 | length 18.9
  Top Layer w0.3: R16.2 34.25,10.25 33.5,9.5 33.5,6 34.75,4.75 41.25,4.75 ; TP16.1 41.6,4.4 41.25,4.75 ; Q6.4 43.168,6.478 42.426,6.478 42.25,6.302 42.25,5.75 41.25,4.75
NetR15_2: R15.2 R21.2 | length 1.6
  Top Layer w0.6: R15.2 R21.2
SCK: IC1.14 J2.2 | length 20.1
  Top Layer w0.3: J2.2 11.53,32.47 12.5,31.5 16,31.5 19,28.5 19,27.793 20.043,26.75 IC1.14
SPE: IC1.25 R19.1 R23.2 | length 9
  Top Layer w0.3: R19.1 18.25,18.25 ; 18.376,18.376 20.25,20.25 20.75,20.25 21.751,21.251 21.999,21.251 22.25,21 IC1.25 IC1.25@22.25,19.901
  Top Layer w0.6: R23.2 R19.1
TEMP: J6.4 R21.1 R24.2 | length 6.6
  Top Layer w0.6: R24.2 22.725,42.275 22.725,43.975 R21.1 25,44 25.5,44.5 J6.4 J6.4@27.095,44.405
U: J5.1 R2.2 R3.2 R4.2 TP4.1 | length 23.4
  Top Layer w0.3: R4.2 38,31.5 v2(38.5,32)
  Bottom Layer w0.3: v2(38.5,32) 39,31.5 55.5,31.5 57.5,33.5 v2(57.5,35.4)
  other v1: 70.75,29.25 76,29.5 70.25,31.25 76.25,31.5 67.5,33 71,33 60.5,33.25 75.25,33.25 73,33.5 64.5,34.25 58.75,34.75 62.25,35.75 66.5,36 74.5,36 59.75,36.75 72,36.75 69.25,37.25 64.75,38.25 76.25,38.25 60,39 67.5,39.25 72.5,39.25 62.5,39.5 60,40.75 63.75,41.5 68,41.5 71,41.5 59.75,42.5
U_DRV: C5.2 IC1.47 Q1.1 Q1.2 Q1.3 Q2.5-6-7-8 R2.1 R3.1 TP3.1 | length 24.7
  Top Layer w0.3: IC1.47 30.75,26.75 33.4,29.4 33.4,32.4 v2(34,33) ; C5.2 31.25,32.696 31.5,32.946 v2(31.5,33)
  Bottom Layer w0.3: v2(31.5,33) v2(45.5,33)
  other v1: 48.25,33 50.5,33.5 54.25,33.5 50.25,36.25 54.5,36.25 50.5,39.5 53,40 50.5,42.75 53.25,43
UH: IC1.17 J3.6 | length 18.3
  Top Layer w0.3: J3.6 10.35,24.85 11.8,26.3 17.657,26.3 18.707,25.25 IC1.17
UL: IC1.18 J3.5 | length 18.7
  Top Layer w0.3: J3.5 9.81,22.31 12.75,25.25 18,25.25 18.5,24.75 IC1.18
Usense: IC1.46 R4.1 TP6.1 | length 10
  Top Layer w0.3: IC1.46 31.45,26.25 34.3,29.1 34.3,31.3 34.5,31.5 R4.1
V: J5.2 R8.2 R9.2 R10.2 TP10.1 | length 22.2
  Top Layer w0.3: R10.2 v2(38.5,18)
  Bottom Layer w0.3: v2(38.5,18) 38.523,18 38.776,17.748 56.952,17.748 57.6,18.395 v1(57.6,19.4)
  other v1: 60.75,20 59,21 62.5,22 60,22.75 70.75,24.25 75.75,24.25 62.75,24.5 65.75,24.5 60,24.75 68.25,25.25 76.5,25.75 60,26.75 70.75,27 62.5,27.25 65.5,27.25 75.5,27.25 67.5,27.75 60,28.5 57.75,29.5 65,29.5 62.25,30.25
V_DRV: C9.2 IC1.42 Q3.1 Q3.2 Q3.3 Q4.5-6-7-8 R8.1 R9.1 TP9.1 | length 20.7
  Top Layer w0.3: IC1.42 35,24.25 35.25,24.5 C9.2 v2(37,25.5)
  Bottom Layer w0.3: v2(37,25.5) v2(48.75,25.5)
  other v1: 46,19 48.25,19 50.5,19.5 52.5,20 54.6,20.1 54.75,21.75 50.5,22 50.5,25.25 52.25,25.25 50.5,28.5 52.5,28.75 54.75,29
V_OFS: C12.2 IC1.12 R18.1 R22.2 | length 14.1
  Top Layer w0.3: C12.2 18.774,35.476 19.524,35.476 20,35 20,30.75 21,29.75 22.074,29.75 22.25,29.574 IC1.12
  Top Layer w0.6: R18.1 R22.2 C12.2
VCC_IO: C13.1 IC1.19 J1.1 R15.1 R18.2 R19.2 R20.2 | length 58.5
  Top Layer w0.3: v1(17.886,24.189) 17.943,24.247 19.228,24.247 19.231,24.25 IC1.19
  Top Layer w0.6: J1.1 13.41,40.09 13.8,39.7 13.8,39.6 13.9,39.5 R18.2 16.5,43.6 16.9,44 R15.1 ; C13.1 16.811,24.189 v1(17.886,24.189) ; R19.2 v2(18.5,19.75)
  Bottom Layer w1: J1.1 15.16,40.09 18.75,36.5 18.75,30.027 17.886,29.163 v1(17.886,24.189) 17.886,20.364 v2(18.5,19.75)
VH: IC1.20 J3.4 | length 19.4
  Top Layer w0.3: J3.4 10.5,19.77 11.9,21.17 11.9,21.9 13.25,23.25 18.879,23.25 19.379,23.75 IC1.20
VL: IC1.21 J3.3 | length 20.8
  Top Layer w0.3: J3.3 10.5,17.23 12.7,19.43 12.7,21.2 14,22.5 18.836,22.5 19.586,23.25 IC1.21
VM: C1.2 C3.2 C4.2 C6.2 C11.2 C14.2 IC1.29 IC1.33 J5.4 Q1.5-6-7-8 Q3.5-6-7-8 Q5.5-6-7-8 TP5.1 | length 21
  Top Layer w0.3: 22.5,17.75 24.25,19.5 IC1.29 ; IC1.33 26.25,18.75 26.5,18.5
  Top Layer w0.5: TP5.1@21,16 TP5.1 22.5,17.75 ; 26.5,18.5 26.857,18.143 C3.2
  Top Layer w0.7: C6.2 TP5.1@21,16
  Top Layer w1: v1(19.25,14.5) 20.893,14.5 C6.2 21.107,14.5 v1(22.75,14.5) ; v1(24.25,14.5) 25.893,14.5 C4.2 26.15,14.393 26.35,14.593 26.35,16.093 26.857,16.6 C3.2 27.057,16.55 27.057,15.693 v1(27.5,15.25)
  other v1: 41.75,13.25 70.5,13.25 72.25,13.25 75,13.25 77,13.25 69,13.5 38,14 40.25,14.25 42,14.75 76,14.75 70,15 39.75,16 41.75,16 70.75,16.5 75.75,16.5 42,26.25 41.75,28 39.5,28.5 42,29.75 39.75,30.25 38,40.5 42,41.25 40.25,42 38.5,42.25 40.25,43.5 41.75,44 38.75,44.25
Vsense: IC1.41 R10.1 TP11.1 | length 10
  Top Layer w0.3: IC1.41 31.5,23.75 33.75,21.5 33.75,18.75 34.5,18 R10.1
W: J5.3 R13.2 R14.2 R17.2 TP15.1 | length 35.3
  Top Layer w0.3: v2(32.5,9.75) 32.25,10 R17.2 32.35,11.5 R17.2@32.6,11.25
  Bottom Layer w0.3: v2(32.5,9.75) 32.5,5.75 34.5,3.75 56.05,3.75 57.5,5.2 v2(57.5,7.75)
  other v1: 59,6.25 61.75,6.25 65,6.75 60,8.25 66.75,8.5 63.25,9.25 60,10.25 65.25,10.5 60,12.25 62.5,13.25 65.25,13.25 59.75,14.25 62.5,16.25 65.5,16.25 68,17.5 71.5,18.5 75.25,18.5 65.5,19.5 68.25,19.5 70.5,20 76,20 67.75,21.5 70.75,21.75 75.75,21.75
W_DRV: C10.2 IC1.38 Q5.1 Q5.2 Q5.3 Q6.5-6-7-8 R13.1 R14.1 TP14.1 | length 33.5
  Top Layer w0.3: IC1.38 30.5,22.25 32.25,20.5 32.25,16.75 31.25,15.75 31.25,14.25 31,14 C10.2 30.25,12.25 v2(29.5,11.5)
  Bottom Layer w0.3: v2(29.5,11.5) 42.169,11.5 42.319,11.35 48.296,11.35 48.446,11.5 v2(48.5,11.5)
  other v1: 45.75,5.25 47.75,5.25 54,6.25 51.8,6.4 50.5,7.25 52.75,8 50.5,9.75 52.75,11.5 50.5,12.25 50.5,14.5 52.75,14.75 55,15
WH: IC1.22 J3.2 | length 22.3
  Top Layer w0.3: J3.2 10.5,14.69 13.5,17.69 13.5,20.5 15,22 19.043,22 19.793,22.75 IC1.22
WL: IC1.23 J3.1 | length 24.7
  Top Layer w0.3: J3.1 11.55,12.15 14.25,14.85 14.25,20.35 15.3,21.4 19.15,21.4 20,22.25 IC1.23
Wsense: IC1.39 R17.1 TP17.1 | length 12.8
  Top Layer w0.3: IC1.39 31.25,22.75 33,21 33,16.25 32.25,15.5 R17.1
pads on no net: FD1.0 FD2.0 FD3.0 IC1.2 IC1.28 IC1.31 IC1.35 IC1.40 IC1.45

## Polygon pours and split planes (outlines as drawn)
V on Bottom Layer "V_L04_P016" (solid, pour order 16): 56.25,31 56.75,31.5 65.75,31.5 69.25,28 77.75,28 77.75,23.25 66.5,23.25 59.5,16.25 56.5,16.25 56.25,16.5
U on Bottom Layer "U_L04_P050" (solid, pour order 50): 56.25,43.25 56.5,43.5 72.5,43.5 73.75,42.25 75.25,42.25 77.75,39.75 77.75,28.5 69.5,28.5 66,32 56.75,32 56.25,32.5
GND on Bottom Layer "GND_L04_P047" (solid, pour order 47): 44.25,11 44,11.25 35.25,11.25 34.75,10.75 34.75,10 34,9.25 34,6.25 35,5.25 41,5.25 41.75,6 41.75,6.75 42.25,7.25 44,7.25 44.25,7.5
GND on Bottom Layer "GND_L04_P049" (solid, pour order 49): 44.25,39 44,39.25 36,39.25 34.5,37.75 34.5,36.25 34.75,36 36.25,36 37,35.25 37.458,35.25 38.5,34 42,34 42.25,34.25 42.25,35 42.5,35.25 44,35.25 44.25,35.5
GND on Bottom Layer "GND_L04_P046" (solid, pour order 46): 44,25 43.75,25.25 38,25.25 37.5,24.75 36,24.75 35.5,24.25 35.5,24 35.25,23.75 35.25,22.5 35.75,22 35.75,21.5 37.5,21.5 38,21 38,19.75 40.75,19.75 42.25,21.25 43.75,21.25 44,21.5
GND on Bottom Layer "GND_L04_P045" (solid, pour order 45): 68.25,12 77.75,12 77.75,5.75 77.5,5.5 76.5,5.5 75.5,4.5 75.5,1.5 75.25,1.25 74.75,1.25 68.75,1.25 68.25,1.75
VM on Bottom Layer "VM_L04_P009" (solid, pour order 9): 47.25,17.15 39.75,17.15 37.25,14.65 37.25,11.65 44.5,11.65 44.75,11.9 47,11.9 47.25,12.15
VM on Bottom Layer "VM_L04_P010" (solid, pour order 10): 38.75,29 37.5,27.75 37.5,26.5 38.3,25.7 38.75,25.7
U_DRV on Bottom Layer "U_DRV_L04_P017" (solid, pour order 17): 47.75,39.5 47.625,39.25 44.75,39.25 44.5,39 44.5,32.5 44.75,32.25 55.5,32.25 55.75,32.5 55.75,33 55.75,43.25 55.5,43.5 47.75,43.5
W_DRV on Bottom Layer "W_DRV_L04_P018" (solid, pour order 18): 47.75,11.5 47.625,11.25 44.75,11.25 44.5,11 44.5,4.5 44.75,4.25 55.5,4.25 55.75,4.5 55.75,5 55.75,15.25 55.5,15.5 47.75,15.5
V_DRV on Bottom Layer "V_DRV_L04_P019" (solid, pour order 19): 47.75,25.5 47.625,25.25 44.75,25.25 44.5,25 44.5,18.5 44.75,18.25 55.5,18.25 55.75,18.5 55.75,19 55.75,29.25 55.5,29.5 47.75,29.5
W on Bottom Layer "W_L04_P020" (solid, pour order 20): 56.25,4.25 56.25,15.25 56.5,15.5 59.5,15.5 66.75,22.75 77.758,22.75 77.758,17.75 70,17.75 67.75,15.5 67.75,4.75 67.25,4.25
VM on Bottom Layer "VM_L04_P032" (solid, pour order 32): 47.25,45 37.75,45 37.25,44.5 37.25,39.75 37.5,39.5 44.5,39.5 44.75,39.75 47,39.75 47.25,40
VM on Bottom Layer "VM_L04_P033" (solid, pour order 33): 47.25,31.2 39.75,31.2 38.75,30.2 38.75,26.2 38.75,25.7 44.5,25.7 44.75,25.95 47,25.95 47.25,26.2
VM on Bottom Layer "VM_L04_P039" (solid, pour order 39): 73.25,17.25 77.75,17.25 77.75,12.5 68.25,12.5 68.25,15.25 70.25,17.25 71,17.25 72.25,17.25
U on Top Layer "U_L01_P035" (solid, pour order 35): 56.25,43.25 56.5,43.5 72.5,43.5 73.75,42.25 75.25,42.25 77.75,39.75 77.75,28.5 69.5,28.5 66,32 56.75,32 56.25,32.5
GND on Top Layer "GND_L01_P044" (solid, pour order 44): 44.311,39.012 44.061,39.262 36.061,39.262 34.561,37.762 34.561,36.262 34.811,36.012 36.311,36.012 37.061,35.262 37.519,35.262 38.561,34.012 42.061,34.012 42.311,34.262 42.311,35.012 42.561,35.262 44.061,35.262 44.311,35.512
GND on Top Layer "GND_L01_P051" (solid, pour order 51): 44.061,11.262 35.311,11.262 34.811,10.762 34.811,10.012 34.061,9.262 34.061,6.262 35.061,5.262 41.061,5.262 41.811,6.012 41.811,6.762 42.311,7.262 44.061,7.262
GND on Top Layer "GND_L01_P041" (solid, pour order 41): 44.125,25 37.875,25 37.625,24.75 36.125,24.75 35.625,24.25 35.625,24 35.375,23.75 35.375,22.5 35.875,22 35.875,21.5 37.625,21.5 38.125,21 38.125,19.75 40.875,19.75 42.375,21.25 43.875,21.25 44.125,21.5
V_DRV on Top Layer "V_DRV_L01_P004" (solid, pour order 4): 47.75,25.5 47.625,25.25 44.75,25.25 44.5,25 44.5,18.5 44.75,18.25 55.5,18.25 55.75,18.5 55.75,19 55.75,29.25 55.5,29.5 47.75,29.5
GND on Top Layer "GND_L01_P037" (solid, pour order 37): 68.25,12 77.75,12 77.75,5.75 77.5,5.5 76.5,5.5 75.5,4.5 75.5,1.5 75.25,1.25 74.75,1.25 68.75,1.25 68.25,1.75
V on Top Layer "V_L01_P013" (solid, pour order 13): 56.25,31 56.75,31.5 65.75,31.5 69.25,28 77.75,28 77.75,23.25 66.5,23.25 59.5,16.25 56.5,16.25 56.25,16.5
U_DRV on Top Layer "U_DRV_L01_P053" (solid, pour order 53): 47.75,39.5 47.625,39.25 44.75,39.25 44.75,32.25 55.5,32.25 55.75,32.5 55.75,33 55.75,43.25 55.5,43.5 47.75,43.5
W_DRV on Top Layer "W_DRV_L01_P003" (solid, pour order 3): 47.75,11.5 47.625,11.25 44.75,11.25 44.5,11 44.5,4.5 44.75,4.25 55.5,4.25 55.75,4.5 55.75,5 55.75,15.25 55.5,15.5 47.75,15.5
VM on Top Layer "VM_L01_P005" (solid, pour order 5): 47.25,45.25 38,45.25 37.25,44.5 37.25,39.75 44.75,39.75 47,39.75 47.25,40
VM on Top Layer "VM_L01_P006" (solid, pour order 6): 47.25,31.2 39.75,31.2 38.75,30.2 38.75,26.2 38.75,25.7 44.5,25.7 44.75,25.95 47,25.95 47.25,26.2
W on Top Layer "W_L01_P007" (solid, pour order 7): 56.25,4.25 56.25,15.25 56.5,15.5 59.5,15.5 66.75,22.75 77.758,22.75 77.758,17.75 70,17.75 67.75,15.5 67.75,4.75 67.25,4.25
VM on Top Layer "VM_L01_P052" (solid, pour order 52): 47.25,17.15 39.75,17.15 37.25,14.65 37.25,11.75 44.6,11.75 44.75,11.9 47,11.9 47.25,12.15
VM on Top Layer "VM_L01_P015" (solid, pour order 15): 73.25,17.25 77.75,17.25 77.75,12.5 68.25,12.5 68.25,15.25 70.25,17.25 71,17.25 72.25,17.25
VM on Int2 (PWR) (split plane): 78.217,46.482 78.433,46.454 78.645,46.407 78.852,46.342 79.053,46.258 79.246,46.158 79.429,46.041 79.602,45.909 79.762,45.762 79.909,45.602 80.041,45.429 80.158,45.246 80.258,45.053 80.342,44.852 80.407,44.645 80.454,44.433 80.482,44.217 80.491,44.016 80.49,44 80.49,3 80.491,2.984 80.482,2.783 80.454,2.567 80.407,2.355 80.342,2.148 80.258,1.947 80.158,1.754 80.041,1.571 79.909,1.398 79.762,1.238 79.602,1.091 79.429,0.959 79.246,0.842 79.053,0.742 78.852,0.658 78.645,0.593 78.433,0.546 78.217,0.518 78.016,0.509 78,0.51 3,0.51 2.984,0.509 2.783,0.518 2.567,0.546 2.355,0.593 2.148,0.658 1.947,0.742 1.754,0.842 1.571,0.959 1.398,1.091 1.238,1.238 1.091,1.398 0.959,1.571 0.842,1.754 0.742,1.947 0.658,2.148 0.593,2.355 0.546,2.567 0.518,2.783 0.509,2.984 0.51,3 0.51,44 0.509,44.016 0.518,44.217 0.546,44.433 0.593,44.645 0.658,44.852 0.742,45.053 0.842,45.246 0.959,45.429 1.091,45.602 1.238,45.762 1.398,45.909 1.571,46.041 1.754,46.158 1.947,46.258 2.148,46.342 2.355,46.407 2.567,46.454 2.783,46.482 2.984,46.491 3,46.49 78,46.49 78.016,46.491
GND on Int1 (GND) (split plane): 78.217,46.482 78.433,46.454 78.645,46.407 78.852,46.342 79.053,46.258 79.246,46.158 79.429,46.041 79.602,45.909 79.762,45.762 79.909,45.602 80.041,45.429 80.158,45.246 80.258,45.053 80.342,44.852 80.407,44.645 80.454,44.433 80.482,44.217 80.491,44.016 80.49,44 80.49,3 80.491,2.984 80.482,2.783 80.454,2.567 80.407,2.355 80.342,2.148 80.258,1.947 80.158,1.754 80.041,1.571 79.909,1.398 79.762,1.238 79.602,1.091 79.429,0.959 79.246,0.842 79.053,0.742 78.852,0.658 78.645,0.593 78.433,0.546 78.217,0.518 78.016,0.509 78,0.51 3,0.51 2.984,0.509 2.783,0.518 2.567,0.546 2.355,0.593 2.148,0.658 1.947,0.742 1.754,0.842 1.571,0.959 1.398,1.091 1.238,1.238 1.091,1.398 0.959,1.571 0.842,1.754 0.742,1.947 0.658,2.148 0.593,2.355 0.546,2.567 0.518,2.783 0.509,2.984 0.51,3 0.51,44 0.509,44.016 0.518,44.217 0.546,44.433 0.593,44.645 0.658,44.852 0.742,45.053 0.842,45.246 0.959,45.429 1.091,45.602 1.238,45.762 1.398,45.909 1.571,46.041 1.754,46.158 1.947,46.258 2.148,46.342 2.355,46.407 2.567,46.454 2.783,46.482 2.984,46.491 3,46.49 78,46.49 78.016,46.491

## Silkscreen, mask and mechanical layers (free items; w line width, h text height)
Top Overlay:
  lines w0.15: 1.95,10.9 5.05,10.9 ; 1.95,26.1 5.05,26.1 ; 1.95,36.275 5.05,36.275
  lines w0.254: 77.9,12.2 77.9,17.9 80.4,17.9 80.4,12.2 ; 77.9,17.5 77.9,23 ; 77.9,28 78.1,28 80.4,28 80.4,33.1 77.9,33.1 77.9,23.1 80.4,23.1 80.4,28.2 80.4,17.5 ; 1.95,5.65 5.05,5.65 5.05,10.9 5.05,26.1 5.05,36.275 5.05,41.5 1.95,41.5 1.95,36.275 1.95,26.1 1.95,10.9 1.95,5.65 ; 25.775,43 25.775,46 36.225,46 36.225,43 25.775,43 ; 77.9,6.8 80.4,6.8 80.4,12.7 77.9,12.7 77.9,6.8
  text "HSU" at 51.285,44.82 h1.5
  text "VCC_IO" at 5.45,38.99 h1.5
  text "TEMP" at 27.671,37.881 h1.5 r90
  text "CURV" at 32.75,37.83 h1.5 r90
  text "CURW" at 30.21,37.646 h1.5 r90
  text "GND" at 5.45,37.053 h1.5
  text "CURU" at 35.91,36.95 h1.5 r90
  text "Ud" at 53.597,34.128 h1.5
  text "CSN" at 5.45,33.91 h1.5
  text "U" at 58.617,32.728 h1.5
  text "LSU" at 41.663,32.52 h1.5
  text "SCK" at 5.45,31.973 h1.5
  text "HSV" at 51.969,30.62 h1.5
  text "U" at 79.955,29.988 h2.4 r90
  text "MOSI" at 5.45,29.433 h1.5
  text "Us" at 32.923,29.228 h1.5
  text "TMC6200" at 13.54,28.261 h2
  text "MISO" at 5.45,26.893 h1.5
  text "V" at 79.969,24.884 h2.4 r90
  text "UH" at 5.45,24.361 h1.5
  text "UL" at 5.45,21.821 h1.5
  text "W" at 79.969,19.493 h2.4 r90
  text "VCP" at 28.65,19.32 h1.5
  text "Vs" at 32.412,19.327 h1.5
  text "VH" at 5.45,19.289 h1.5
  text "LSV" at 38.847,18.52 h1.5
  text "Vd" at 52.585,18.427 h1.5
  text "V" at 57.753,17.819 h1.5
  text "VL" at 5.45,16.749 h1.5
  text "HSW" at 51.485,16.32 h1.5
  text "VM" at 18.241,15.619 h1.5
  text "Ws" at 30.928,15.227 h1.5
  text "WH" at 5.45,14.209 h1.5
  text "VM" at 79.969,13.766 h2.4 r90
  text "WL" at 5.45,11.05 h1.5
  text "FAULT" at 5.45,9.121 h1.5
  text "GND" at 79.867,7.518 h2.4 r90
  text "DRV_EN" at 5.45,5.97 h1.5
  text "Wd" at 51.301,4.627 h1.5
  text "W" at 61.57,4.519 h1.5
  text "LSW" at 38.262,3.72 h1.5
  text "TMC6200-BOB" at 16.014,3.501 h2.5
  text "6xSIDR626" at 40.348,1.661 h2
  text "Waibl Leonhard" at 15.79,1.112 h2.5
Mechanical 1:
  lines w0.254: 0,3 ccw(c3,3) 3,0 6,0 9,0 78,0 ccw(c78,3) 81,3 81,44 ccw(c78,44) 78,47 9,47 6,47 3,47 ccw(c3,44) 0,44 0,3
Stack Table:
  drawing of 581 lines, arcs and shapes, not listed
  text "Layer" at -43.993,263.756 h1.46
  text "Name" at -34.025,263.756 h1.46
  text "Material" at -1.744,263.756 h1.46
  text "Thickness" at 17.925,263.756 h1.46
  text "Constant" at 33.714,263.756 h1.46
  text "Board Layer Stack" at 47.562,263.756 h1.46
  text "Top Overlay" at -34.025,260.844 h1.46
  text "Top Solder" at -34.025,257.933 h1.46
  text "SM-002" at -1.744,257.933 h1.46
  text "0.025mm" at 17.925,257.933 h1.46
  text "4" at 33.714,257.933 h1.46
  text "Top Surface Finish" at -34.025,255.021 h1.46
  text "Nickel, Gold" at -1.744,255.021 h1.46
  text "0.004mm" at 17.925,255.021 h1.46
  text "1" at -43.993,252.11 h1.46
  text "Top Layer" at -34.025,252.11 h1.46
  text "CF-004" at -1.744,252.11 h1.46
  text "0.035mm" at 17.925,252.11 h1.46
  text "Dielectric 1" at -34.025,249.199 h1.46
  text "PP-017" at -1.744,249.199 h1.46
  text "0.130mm" at 17.925,249.199 h1.46
  text "4.3" at 33.714,249.199 h1.46
  text "Dielectric 2" at -34.025,246.287 h1.46
  text "PP-017" at -1.744,246.287 h1.46
  text "0.130mm" at 17.925,246.287 h1.46
  text "4.3" at 33.714,246.287 h1.46
  text "2" at -43.993,243.376 h1.46
  text "Int1 (GND)" at -34.025,243.376 h1.46
  text "CF-004" at -1.744,243.376 h1.46
  text "0.018mm" at 17.925,243.376 h1.46
  text "Dielectric 3" at -34.025,240.465 h1.46
  text "Core-039" at -1.744,240.465 h1.46
  text "0.711mm" at 17.925,240.465 h1.46
  text "4.8" at 33.714,240.465 h1.46
  text "3" at -43.993,237.553 h1.46
  text "Int2 (PWR)" at -34.025,237.553 h1.46
  text "CF-004" at -1.744,237.553 h1.46
  text "0.018mm" at 17.925,237.553 h1.46
  text "Dielectric 4" at -34.025,234.642 h1.46
  text "PP-017" at -1.744,234.642 h1.46
  text "0.130mm" at 17.925,234.642 h1.46
  text "4.3" at 33.714,234.642 h1.46
  text "Dielectric 5" at -34.025,231.731 h1.46
  text "PP-017" at -1.744,231.731 h1.46
  text "0.130mm" at 17.925,231.731 h1.46
  text "4.3" at 33.714,231.731 h1.46
  text "4" at -43.993,228.819 h1.46
  text "Bottom Layer" at -34.025,228.819 h1.46
  text "CF-004" at -1.744,228.819 h1.46
  text "0.035mm" at 17.925,228.819 h1.46
  text "Bottom Surface Finish" at -34.025,225.908 h1.46
  text "Nickel, Gold" at -1.744,225.908 h1.46
  text "0.004mm" at 17.925,225.908 h1.46
  text "Bottom Solder" at -34.025,222.997 h1.46
  text "SM-002" at -1.744,222.997 h1.46
  text "0.025mm" at 17.925,222.997 h1.46
  text "4" at 33.714,222.997 h1.46
  text "Bottom Overlay" at -34.025,220.085 h1.46
Drill Drawing:
  circle w0.254: c86.625,266.01 r0.847
  lines w0.254: 85.778,257.967 86.202,257.967 86.625,257.544 87.048,257.967 87.472,257.967 87.048,258.39 87.472,258.813 87.048,258.813 86.625,259.237 86.202,258.813 85.778,258.813 86.202,258.39 85.778,257.967 ; 85.778,261.354 86.625,261.777 87.472,261.354 87.048,262.2 87.472,263.047 86.625,262.623 85.778,263.047 86.202,262.2 85.778,261.354 ; 85.778,270.667 87.472,270.667 86.625,268.974 85.778,270.667 ; 85.778,272.784 87.472,272.784 87.472,274.477 85.778,274.477 85.778,272.784
  lines w0.381: 84.259,256.401 359.62,256.401 ; 84.259,275.451 359.62,275.451 ; 98.252,252.591 98.252,279.261 ; 113.488,252.591 113.488,279.261 ; 141.927,252.591 141.927,279.261 ; 154.777,252.591 154.777,279.261 ; 173.415,252.591 173.415,279.261 ; 211.504,252.591 211.504,279.261 ; 226.486,252.591 226.486,279.261 ; 245.429,252.591 245.429,279.261 ; 269.045,252.591 269.045,279.261 ; 290.73,252.591 290.73,279.261 ; 324.604,252.591 324.604,279.261 ; 84.259,252.591 359.62,252.591 359.62,279.261 84.259,279.261 84.259,252.591
  text "Symbol" at 86.545,276.594 h1.83
  text "Count" at 99.395,276.594 h1.83
  text "Hole Size" at 114.631,276.594 h1.83
  text "Plated" at 143.07,276.594 h1.83
  text "Hole Type" at 155.92,276.594 h1.83
  text "Drill Layer Pair" at 174.558,276.594 h1.83
  text "Via/Pad" at 212.647,276.594 h1.83
  text "Pad Shape" at 227.629,276.594 h1.83
  text "Template" at 246.572,276.594 h1.83
  text "Description" at 270.188,276.594 h1.83
  text "Hole Tolerance (+)" at 291.873,276.594 h1.83
  text "Hole Tolerance (-)" at 325.747,276.594 h1.83
  text "4" at 99.395,272.784 h1.52
  text "118.11mil (3.000mm)" at 114.631,272.784 h1.52
  text "PTH" at 143.07,272.784 h1.52
  text "Round" at 155.92,272.784 h1.52
  text "Top Layer - Bottom Layer" at 174.558,272.784 h1.52
  text "Pad" at 212.647,272.784 h1.52
  text "Rounded" at 227.629,272.784 h1.52
  text "c320h300m320p0" at 246.572,272.784 h1.52
  text "5" at 99.395,268.974 h1.52
  text "59.06mil (1.500mm)" at 114.631,268.974 h1.52
  text "PTH" at 143.07,268.974 h1.52
  text "Round" at 155.92,268.974 h1.52
  text "Top Layer - Bottom Layer" at 174.558,268.974 h1.52
  text "Pad" at 212.647,268.974 h1.52
  text "Rounded" at 227.629,268.974 h1.52
  text "c300h150m300p0" at 246.572,268.974 h1.52
  text "18" at 99.395,265.164 h1.52
  text "40.00mil (1.016mm)" at 114.631,265.164 h1.52
  text "PTH" at 143.07,265.164 h1.52
  text "Round" at 155.92,265.164 h1.52
  text "Top Layer - Bottom Layer" at 174.558,265.164 h1.52
  text "Pad" at 212.647,265.164 h1.52
  text "(Mixed)" at 227.629,265.164 h1.52
  text "(Mixed)" at 246.572,265.164 h1.52
  text "54" at 99.395,261.354 h1.52
  text "11.81mil (0.300mm)" at 114.631,261.354 h1.52
  text "PTH" at 143.07,261.354 h1.52
  text "Round" at 155.92,261.354 h1.52
  text "Top Layer - Bottom Layer" at 174.558,261.354 h1.52
  text "Via" at 212.647,261.354 h1.52
  text "Rounded" at 227.629,261.354 h1.52
  text "(Mixed)" at 246.572,261.354 h1.52
  text "196" at 99.395,257.544 h1.52
  text "15.75mil (0.400mm)" at 114.631,257.544 h1.52
  text "PTH" at 143.07,257.544 h1.52
  text "Round" at 155.92,257.544 h1.52
  text "Top Layer - Bottom Layer" at 174.558,257.544 h1.52
  text "Via" at 212.647,257.544 h1.52
  text "Rounded" at 227.629,257.544 h1.52
  text "v60h40m91" at 246.572,257.544 h1.52
  text "277 Total" at 99.395,253.734 h1.52

## Text inside footprints (layer, text, board x,y; h text height)
D7: Mechanical 13 "+" at 13,36.817 h1 r90